# EAGLE board BareBones (EAGLE 7.6.0)
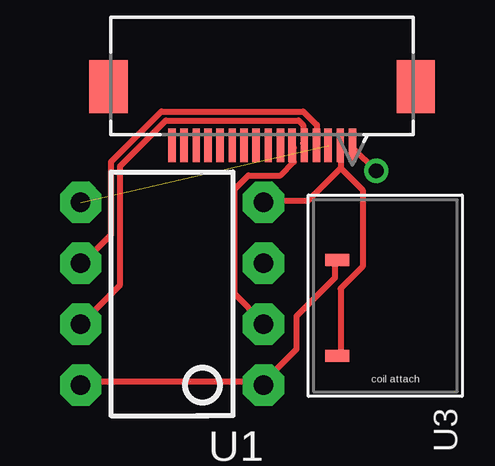
[diagram p0: board, top side]
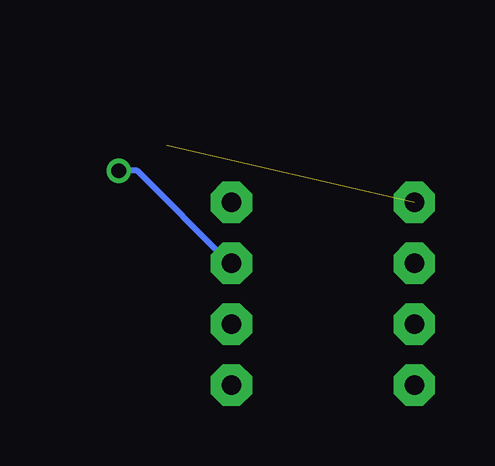
[diagram p1: board, bottom side, seen from below]

No outline drawn. Coordinates in mm, seen from the top.
Copper layers (1*16): Top 0.035mm / dielectric 1.5mm / Bottom 0.035mm
Design rules "default *": minimum track width 10mil, minimum drill 24mil, track to track 5mil, track to pad 5mil, pad to pad 5mil, via to via 8mil, smd to smd 8mil, copper to edge 20mil, drill to drill 8mil, minimum pad ring 10mil, minimum via ring 8mil, stop-mask expansion 4mil, vias tented up to drill 0mil, thermal gap 10mil

## Footprints (pad centres in the part's own frame; a part is rotated, then mirrored left to right if it is on the bottom)
DIP08 = drill 0.813 pad 1.727 octagon: 1 -3.81,-3.81; 2 -1.27,-3.81; 3 1.27,-3.81; 4 3.81,-3.81; 5 3.81,3.81; 6 1.27,3.81; 7 -1.27,3.81; 8 -3.81,3.81
MOLEX_52892-1695 = smd 0.305 x 1.397: 1 3.759,2.896; 2 3.251,2.896; 3 2.743,2.896; 4 2.261,2.896; 5 1.753,2.896; 6 1.245,2.896; 7 0.762,2.896; 8 0.254,2.896; 9 -0.254,2.896; 10 -0.762,2.896; 11 -1.245,2.896; 12 -1.753,2.896; 13 -2.261,2.896; 14 -2.743,2.896; 15 -3.251,2.896; 16 -3.759,2.896 | smd 1.6 x 2.21: 17 -6.401,5.359; 18 6.401,5.359
P9027LP-R = smd 1 x 0.5: OUT 2,-1.5; P$2 2,2.5

## Placement (x,y rotation side)
U1  TINY85-20-DIP  [DIP08]  4.64,64.02 90 top
U2  52892-1695  [MOLEX_52892-1695]  8.39,67.31 0 top
U3  [P9027LP-R]  13.52,63.94 180 top

## Library data of the parts
U1 = SparkFun-DigitalIC; PROD_ID: IC-09445
U2 = Molex_By_element14_Batch_1; MPN: 52892-1695; OC_FARNELL: 1556807; OC_NEWARK: 92M6601; PACKAGE: CONNECTOR, FPC, ZIF, 0.50MM, 16 WAY; SUPPLIER: Molex
U3 = GeekAmmo

## Nets
N$1: U1.3 U2.1
N$2: U1.2 U2.6
N$3: U1.1 U1.8 U3.OUT
N$4: U1.4 U2.2 U3.P$2
N$5: U1.5 U2.3
N$6: U1.6 U2.4
N$7: U1.7 U2.5

## Tracks (layer width: path | path; a pad name or v marks a point on that pad's centre or on a via)
N$1  (via drill 0.61)
  Top 0.254: v13.14,69.15 12.19,70.1 U2.1
  Bottom 0.254: v13.14,69.15 12.38,69.15 8.57,65.34 U1.3
N$2
  Top 0.254: U2.6 9.72,70.1 9.72,69.53 9.14,68.96 7.81,68.96 7.24,68.39 7.24,64.01 8.38,62.87 U1.2
N$3
  Top 0.254: U3.OUT 11.43,65.38 11.43,64.69 9.83,63.09 9.83,61.72 8.46,60.35 U1.1 8.23,60.35 0.91,60.35 U1.8
N$4
  Top 0.254: 11.66,69.27 12.57,68.35 12.57,65.15 11.66,64.24 11.66,61.49 U3.P$2 | 11.66,69.27 11.66,70.18 U2.2 | 11.66,69.27 10.29,67.89 8.46,67.89 U1.4
N$5  (1 unrouted)
N$6
  Top 0.254: U2.4 10.67,70.29 10.67,71.06 10.1,71.63 4.19,71.63 2.1,69.53 2.1,66.48 0.95,65.34 U1.6
N$7
  Top 0.254: U2.5 10.1,70.29 10.1,71.06 9.91,71.25 4.38,71.25 2.48,69.34 2.48,64.39 0.95,62.87 U1.7